# Altium PCB EG701_BMS.PcbDoc (part 2 of 2)
Units mm, origin at the board's own origin, x right, y up, seen from the top; angles counter-clockwise.
Board outline 90 x 50 mm, 2 copper layers (Top Layer, Bottom Layer); 94 components, 53 nets, 237 pads, 123 vias.
Unrouted connection lines stored in the file: 37.
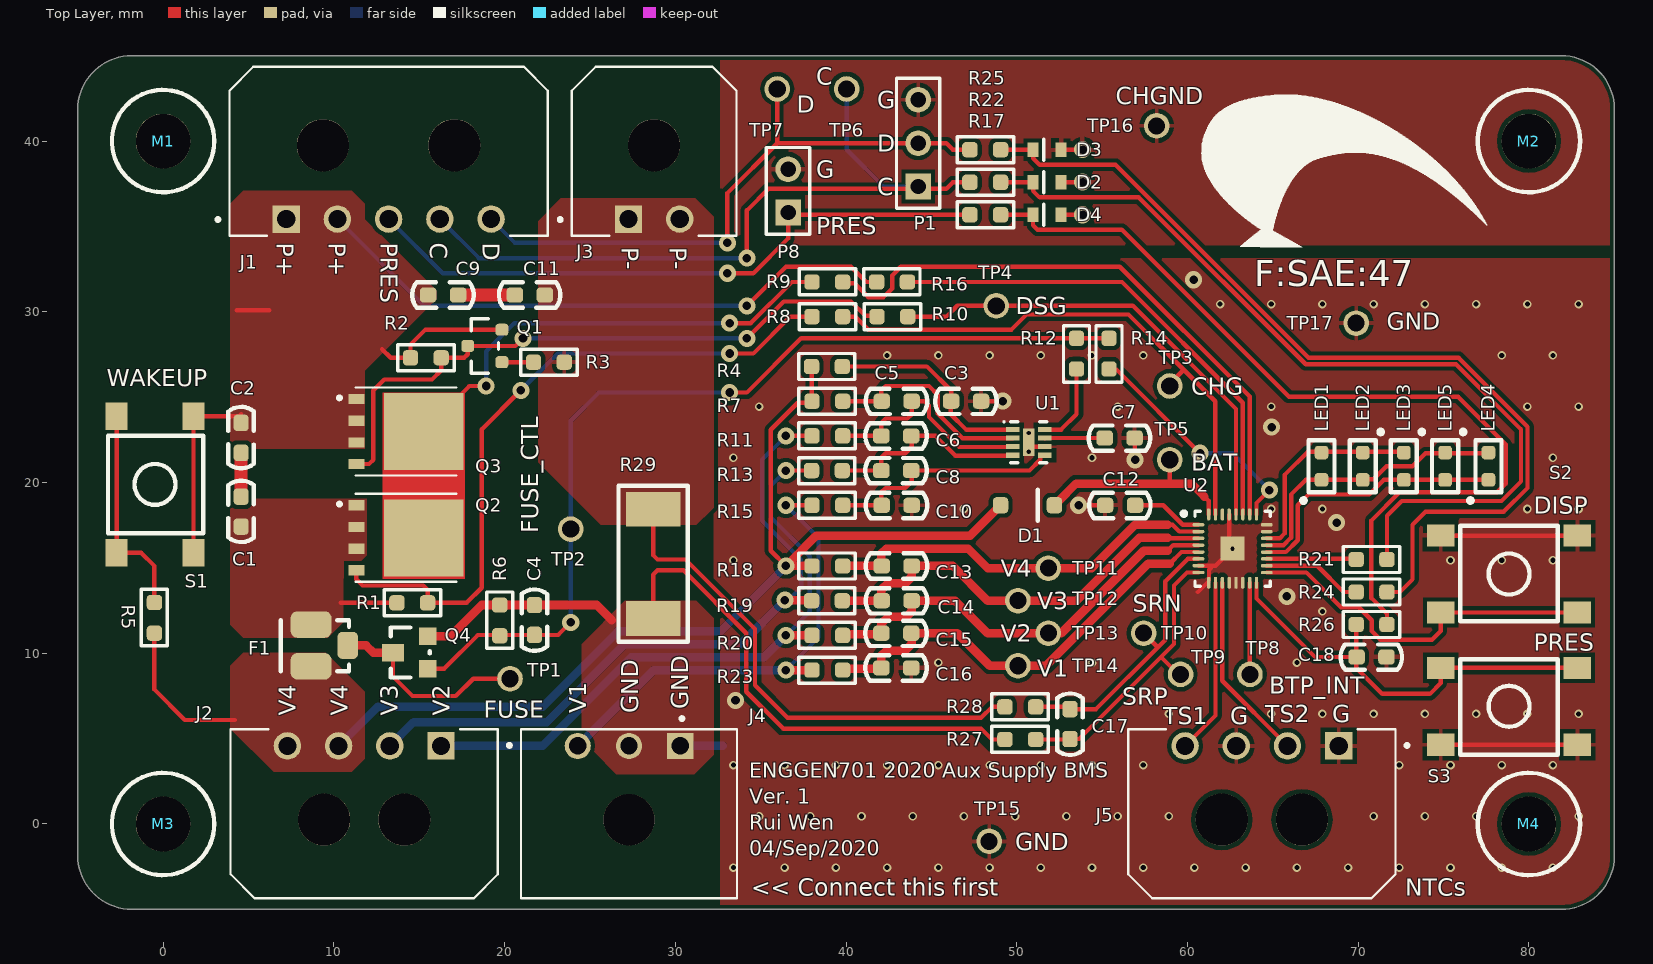
[diagram p0: Top Layer view]

## Part data (continued)
R4 R9 R18 R19 R20 R22 R23 R25 R27 R28: library part 100R_0603_5%_1/10W, "Res Thick Film 0603 100 Ohm 5% 0.1W(1/10W) ±100ppm/C Molded SMD Paper T/R", Case/Package=0603, Case Code (Metric)=1608, Manufacturer 1=Yageo, Manufacturer Part Number 1=RC0603JR-07100RL, Max Operating Temperature=155°C, Min Operating Temperature=-55°C, Power Rating=100mW, Supplier Part Number 1=311-100GRCT-ND, Temperature Coefficient=100ppm/°C, Tolerance=5%, Voltage Rating=50V, Case Code (Imperial)=0603, ComponentLink1Description=https://datasheet.ciiva.com/15189/getdatasheetpartid-325207-15189846.pdf?src-supplier=Verical, ComponentLink1URL=https://datasheet.ciiva.com/15189/getdatasheetpartid-325207-15189846.pdf?src-supplier=Verical, ComponentLink2Description=https://datasheet.ciiva.com/7746/443971-7746425.pdf?src-supplier=Element14, ComponentLink2URL=https://datasheet.ciiva.com/7746/443971-7746425.pdf?src-supplier=Element14, ComponentLink3Description=https://datasheet.ciiva.com/8883/pyu-rc0603-51-rohs-l-4-8883047.pdf?src-supplier=Avnet, ComponentLink3URL=https://datasheet.ciiva.com/8883/pyu-rc0603-51-rohs-l-4-8883047.pdf?src-supplier=Avnet, ComponentLink4Description=https://datasheet.ciiva.com/7746/443971-7746426.pdf?src-supplier=Element14, ComponentLink4URL=https://datasheet.ciiva.com/7746/443971-7746426.pdf?src-supplier=Element14, Composition="Thick Film", Contact Plating=Tin,Matte, Depth=0.8mm, Lead Free="Lead Free", Length=1.6mm, Military Standard=Not, Number of Pins=2, Packaging="Tape and Reel", Pricing 1="1=0.10000, 10=0.01800, 100=0.00740, 1000=0.00334, 2500=0.00290 (USD)", Radiation Hardening=No, REACH SVHC=Unknown, Resistance=100R, RoHS=Yes, Stock 1=6886393, Supplier 1=Digi-Key, Termination=SMD/SMT, Voltage Rating (DC)=50V, Width=0.8mm
R6: library part 51K_0603_1%_1/10W, "RES SMD 51K OHM 1% 1/10W 0603", Case/Package=0603, Case Code (Metric)=1608, Manufacturer 1=Yageo, Manufacturer Part Number 1=RC0603FR-0751KL, Max Operating Temperature=155°C, Max Power Dissipation=100mW, Min Operating Temperature=-55°C, Package Quantity=1, Resistance=51kR, Supplier Part Number 1=311-51.0KHRCT-ND, Temperature Coefficient=100ppm/°C, Tolerance=1%, Voltage Rating=50V, Case Code (Imperial)=0603, ComponentLink1Description=https://datasheet.ciiva.com/11819/0900766b80f96399-11819378.pdf?src-supplier=RSComponents, ComponentLink1URL=https://datasheet.ciiva.com/11819/0900766b80f96399-11819378.pdf?src-supplier=RSComponents, ComponentLink2Description=https://datasheet.ciiva.com/12558/rc0603-272842-12558554.pdf?src-supplier=Mouser, ComponentLink2URL=https://datasheet.ciiva.com/12558/rc0603-272842-12558554.pdf?src-supplier=Mouser, ComponentLink3Description=https://datasheet.ciiva.com/2454/pyu-r-int-thick-7-2454123.pdf?src-supplier=Digi-Key, ComponentLink3URL=https://datasheet.ciiva.com/2454/pyu-r-int-thick-7-2454123.pdf?src-supplier=Digi-Key, ComponentLink4Description=https://datasheet.ciiva.com/2454/pyu-r-int-thick-7-2454124.pdf?src-supplier=Digi-Key, ComponentLink4URL=https://datasheet.ciiva.com/2454/pyu-r-int-thick-7-2454124.pdf?src-supplier=Digi-Key, ComponentLink5Description=https://datasheet.ciiva.com/2454/pyu-r-int-thick-7-2454125.pdf?src-supplier=Digi-Key, ComponentLink5URL=https://datasheet.ciiva.com/2454/pyu-r-int-thick-7-2454125.pdf?src-supplier=Digi-Key, ComponentLink6Description=https://datasheet.ciiva.com/46395/443971-46395014.pdf?src-supplier=Element14, ComponentLink6URL=https://datasheet.ciiva.com/46395/443971-46395014.pdf?src-supplier=Element14, Composition="Thick Film", Depth=0.8mm, Features="Moisture Resistant", Height=0.45mm, Lead Free="Lead Free", Length=1.6mm, Number of Pins=2, Number of Terminations=2, Packaging="Tape and Reel", Power Rating=100mW, Pricing 1="1=0.10000, 10=0.02200, 100=0.00900, 1000=0.00405, 2500=0.00352 (USD)", REACH SVHC="No SVHC", RoHS=Yes, Stock 1=3246526, Supplier 1=Digi-Key, Termination=SMD/SMT, Voltage Rating (DC)=50V, Width=0.8mm
R7 R11 R13 R15 R17: library part 1K_0603_1%_1/10W, "RES SMD 1K OHM 1% 1/10W 0603", Case/Package=0603, Case Code (Metric)=1608, Manufacturer 1=Yageo, Manufacturer Part Number 1=RC0603FR-071KL, Max Operating Temperature=155°C, Min Operating Temperature=-55°C, Power Rating=100mW, Resistance=1kR, Supplier Part Number 1=311-1.00KHRDKR-ND, Temperature Coefficient=100ppm/°C, Tolerance=1%, Voltage Rating=50V, Case Code (Imperial)=0603, ComponentLink1Description=https://datasheet.ciiva.com/11808/0900766b80f96399-11808081.pdf?src-supplier=RSComponents, ComponentLink1URL=https://datasheet.ciiva.com/11808/0900766b80f96399-11808081.pdf?src-supplier=RSComponents, ComponentLink2Description=https://datasheet.ciiva.com/25906/pyu-rc0603-51-rohs-l-4-25906933.pdf?src-supplier=Avnet+Europe, ComponentLink2URL=https://datasheet.ciiva.com/25906/pyu-rc0603-51-rohs-l-4-25906933.pdf?src-supplier=Avnet+Europe, ComponentLink3Description=https://datasheet.ciiva.com/7660/1868787-7660790.pdf?src-supplier=Element14, ComponentLink3URL=https://datasheet.ciiva.com/7660/1868787-7660790.pdf?src-supplier=Element14, ComponentLink4Description=https://datasheet.ciiva.com/7746/1738695-7746279.pdf?src-supplier=Element14, ComponentLink4URL=https://datasheet.ciiva.com/7746/1738695-7746279.pdf?src-supplier=Element14, ComponentLink5Description=https://datasheet.ciiva.com/7746/1686128-7746280.pdf?src-supplier=Element14, ComponentLink5URL=https://datasheet.ciiva.com/7746/1686128-7746280.pdf?src-supplier=Element14, ComponentLink6Description=https://datasheet.ciiva.com/28386/pyu-rc0603-51-rohs-l-4-28386648.pdf?src-supplier=Avnet+Europe, ComponentLink6URL=https://datasheet.ciiva.com/28386/pyu-rc0603-51-rohs-l-4-28386648.pdf?src-supplier=Avnet+Europe, ComponentLink7Description=https://datasheet.ciiva.com/7746/1738695-7746281.pdf?src-supplier=Element14, ComponentLink7URL=https://datasheet.ciiva.com/7746/1738695-7746281.pdf?src-supplier=Element14, ComponentLink8Description=https://datasheet.ciiva.com/8896/pyu-rc0603-51-rohs-l-4-8896106.pdf?src-supplier=Avnet, ComponentLink8URL=https://datasheet.ciiva.com/8896/pyu-rc0603-51-rohs-l-4-8896106.pdf?src-supplier=Avnet, ComponentLink9Description=https://datasheet.ciiva.com/15189/getdatasheetpartid-404327-15189644.pdf?src-supplier=Verical, ComponentLink9URL=https://datasheet.ciiva.com/15189/getdatasheetpartid-404327-15189644.pdf?src-supplier=Verical, ComponentLink10Description=https://datasheet.ciiva.com/7983/443971-7983613.pdf?src-supplier=Element14, ComponentLink10URL=https://datasheet.ciiva.com/7983/443971-7983613.pdf?src-supplier=Element14, Composition="Thick Film", Contact Plating=Tin,Matte, Depth=0.8mm, Height=0.45mm, Lead Free="Lead Free", Length=1.6mm, Military Standard=Not, Packaging="Tape and Reel", Pricing 1="1=0.10000, 10=0.02300, 100=0.00940, 1000=0.00421, 2500=0.00366 (USD)", Radiation Hardening=No, REACH SVHC="No SVHC", RoHS=Yes, Stock 1=40608315, Supplier 1=Digi-Key, Termination=SMD/SMT
R8 R10 R12 R14: library part 5K1_0603_1%_1/10W, "RES SMD 5.1K OHM 1% 1/10W 0603", Case/Package=0603, Case Code (Metric)=1608, Manufacturer 1=Yageo, Manufacturer Part Number 1=RC0603FR-075K1L, Max Operating Temperature=155°C, Max Power Dissipation=100mW, Min Operating Temperature=-55°C, Package Quantity=1, Resistance=5.1kR, Supplier Part Number 1=311-5.10KHRCT-ND, Temperature Coefficient=100ppm/°C, Tolerance=1%, Voltage Rating=50V, Case Code (Imperial)=0603, ComponentLink1Description=https://datasheet.ciiva.com/46395/443971-46395016.pdf?src-supplier=Element14, ComponentLink1URL=https://datasheet.ciiva.com/46395/443971-46395016.pdf?src-supplier=Element14, ComponentLink2Description=https://datasheet.ciiva.com/15189/getdatasheetpartid-326732-15189786.pdf?src-supplier=Verical, ComponentLink2URL=https://datasheet.ciiva.com/15189/getdatasheetpartid-326732-15189786.pdf?src-supplier=Verical, ComponentLink3Description=https://datasheet.ciiva.com/2454/pyu-r-int-thick-7-2454045.pdf?src-supplier=Digi-Key, ComponentLink3URL=https://datasheet.ciiva.com/2454/pyu-r-int-thick-7-2454045.pdf?src-supplier=Digi-Key, ComponentLink4Description=https://datasheet.ciiva.com/2454/pyu-r-int-thick-7-2454046.pdf?src-supplier=Digi-Key, ComponentLink4URL=https://datasheet.ciiva.com/2454/pyu-r-int-thick-7-2454046.pdf?src-supplier=Digi-Key, ComponentLink5Description=https://datasheet.ciiva.com/2454/pyu-r-int-thick-7-2454047.pdf?src-supplier=Digi-Key, ComponentLink5URL=https://datasheet.ciiva.com/2454/pyu-r-int-thick-7-2454047.pdf?src-supplier=Digi-Key, Composition="Thick Film", Depth=0.8mm, Features="Moisture Resistant", Height=0.022inch, Lead Free="Lead Free", Length=0.063inch, Military Standard=Not, Number of Pins=2, Number of Terminations=2, Packaging="Tape and Reel", Power Rating=100mW, Pricing 1="1=0.10000, 10=0.02200, 100=0.00900, 1000=0.00405, 2500=0.00352 (USD)", REACH SVHC="No SVHC", RoHS=Yes, Stock 1=2194732, Supplier 1=Digi-Key, Termination=SMD/SMT, Voltage Rating (DC)=50V, Width=0.031inch
R21 R24 R26: library part 200R_0603_1%_1/10W, "RES SMD 200 OHM 1% 1/10W 0603", Case/Package=0603, Case Code (Metric)=1608, Manufacturer 1=Yageo, Manufacturer Part Number 1=RC0603FR-07200RL, Max Operating Temperature=155°C, Min Operating Temperature=-55°C, Package Quantity=5000, Power Rating=100mW, Supplier Part Number 1=311-200HRCT-ND, Temperature Coefficient=100ppm/°C, Tolerance=1%, Voltage Rating=50V, Working Voltage=75V, Case Code (Imperial)=0603, ComponentLink1Description=https://datasheet.ciiva.com/11809/0900766b80f96399-11809240.pdf?src-supplier=RSComponents, ComponentLink1URL=https://datasheet.ciiva.com/11809/0900766b80f96399-11809240.pdf?src-supplier=RSComponents, ComponentLink2Description=https://datasheet.ciiva.com/46395/443971-46395029.pdf?src-supplier=Element14, ComponentLink2URL=https://datasheet.ciiva.com/46395/443971-46395029.pdf?src-supplier=Element14, Composition="Thick Film", Depth=0.8mm, Height=0.45mm, Lead Free="Lead Free", Length=1.6mm, Military Standard=Not, Number of Pins=2, Number of Terminations=2, Packaging="Tape and Reel", Pricing 1="1=0.10000, 10=0.02200, 100=0.00900, 1000=0.00405, 2500=0.00352 (USD)", REACH SVHC="No SVHC", Resistance=200R, RoHS=Yes, Stock 1=2577421, Supplier 1=Digi-Key, Termination=SMD/SMT, Voltage Rating (DC)=50V, Width=0.8mm
R29: library part 0.001R_2512_1%_2W_50ppm, "RES 0.001 OHM 1% 2W 2512", Case/Package=2512, Case Code (Metric)=6432, Manufacturer 1="Stackpole Electronics", Manufacturer Part Number 1=CSNL2512FT1L00, Max Operating Temperature=170°C, Max Power Dissipation=2W, Min Operating Temperature=-55°C, Resistance=1mR, Supplier Part Number 1=CSNL2512FT1L00CT-ND, Temperature Coefficient=50ppm/°C, Tolerance=1%, Case Code (Imperial)=2512, ComponentLink1Description=http://components.arrow.com/part/dataview/47858191S8378277N1174?src-supplier=Arrow, ComponentLink1URL=http://components.arrow.com/part/dataview/47858191S8378277N1174?src-supplier=Arrow, ComponentLink2Description=http://www.seielect.com/Catalog/SEI-csnl.pdf?src-supplier=Future+Electronics, ComponentLink2URL=http://www.seielect.com/Catalog/SEI-csnl.pdf?src-supplier=Future+Electronics, ComponentLink3Description=https://www.seielect.com/catalog/SEI-Packaging.pdf?src-supplier=Digi-Key, ComponentLink3URL=https://www.seielect.com/catalog/SEI-Packaging.pdf?src-supplier=Digi-Key, ComponentLink4Description=https://www.seielect.com/Catalog/SEI-csnl.pdf?src-supplier=Digi-Key, ComponentLink4URL=https://www.seielect.com/Catalog/SEI-csnl.pdf?src-supplier=Digi-Key, ComponentLink5Description=https://www.seielect.com/Catalog/SEI-CSNL.pdf?src-supplier=Avnet, ComponentLink5URL=https://www.seielect.com/Catalog/SEI-CSNL.pdf?src-supplier=Avnet, Composition="Metal Foil", Contact Plating=Tin,Matte, Features="Moisture Resistant", Height=0.033inch, Lead Free="Lead Free", Length=0.25inch, Mount="Surface Mount", Number of Terminations=2, Packaging="Tape and Reel", Power Rating=2W, Pricing 1="1=0.65000, 10=0.53900, 25=0.46200, 50=0.41580, 100=0.36190, 250=0.32340, 500=0.26180, 1000=0.21175 (USD)", Radiation Hardening=No, RoHS=Yes, Stock 1=126804, Supplier 1=Digi-Key, Width=0.125inch
S1 S2 S3: library part 41-KRSM6-1, "SMT tact switch from Hi-Q"
TP1 TP2 TP3 TP4 TP5 TP6 TP7 TP8 TP9 TP10 TP11 TP12 TP13 TP14 TP15 TP16 TP17: library part TP_5021, "Thru Hole Mount Unisulated Test Point", Color=Silver, Manufacturer 1="Keystone Electronics", Manufacturer Part Number 1=5021, Package Quantity=100, Supplier Part Number 1=36-5021-ND, Body Material=Bronze, ComponentLink1Description=https://datasheet.ciiva.com/15242/5021-15242766.pdf?src-supplier=Arrow+Europe, ComponentLink1URL=https://datasheet.ciiva.com/15242/5021-15242766.pdf?src-supplier=Arrow+Europe, ComponentLink2Description=https://datasheet.ciiva.com/2917/5021-2917622.pdf?src-supplier=Digi-Key, ComponentLink2URL=https://datasheet.ciiva.com/2917/5021-2917622.pdf?src-supplier=Digi-Key, Contact Material=Bronze, Contact Plating=Silver, Lead Free="Lead Free", Material=Bronze,Silver, Mount="Through Hole", Packaging=Bulk, Plating=Silver, Pricing 1="1=0.23000, 25=0.18760, 100=0.17820, 250=0.16780, 500=0.15050, 1000=0.10548, 2500=0.09669, 5000=0.09376, 10000=0.08497 (USD)", REACH SVHC="No SVHC", RoHS=Yes, Stock 1=36492, Supplier 1=Digi-Key
U1: "IC BATT PROT 2-4CELL LIION 8WSON", Manufacturer 1="Texas Instruments", Max Operating Temperature=85°C, Min Operating Temperature=-40°C, Operating Supply Current=1uA, Operating Supply Voltage=20V, Output Current=4.5mA, Output Voltage=30V, Package Quantity=1, Supplier Part Number 1=296-34984-1-ND, ComponentLink1Description=https://datasheet.ciiva.com/6613/bq294700-6613741.pdf?src-supplier=Digi-Key, ComponentLink1URL=https://datasheet.ciiva.com/6613/bq294700-6613741.pdf?src-supplier=Digi-Key, ComponentLink2Description=https://datasheet.ciiva.com/6613/bq294700-6613742.pdf?src-supplier=Digi-Key, ComponentLink2URL=https://datasheet.ciiva.com/6613/bq294700-6613742.pdf?src-supplier=Digi-Key, ComponentLink3Description=https://datasheet.ciiva.com/6613/bq294700-6613743.pdf?src-supplier=Digi-Key, ComponentLink3URL=https://datasheet.ciiva.com/6613/bq294700-6613743.pdf?src-supplier=Digi-Key, Contact Plating=Gold, Lead Free="Lead Free", Manufacturer Part Number 1=BQ294700DSGR, Mount="Surface Mount", Number of Pins=8, Packaging="Tape and Reel", Pricing 1="1=0.86000, 10=0.75900, 25=0.71320, 100=0.54050, 250=0.46000, 500=0.43700, 1000=0.33350 (USD)", RoHS=Yes, Stock 1=15401, Supplier 1=Digi-Key
U2: "1-4 series Li-ion battery pack manager supporting Turbo Mode 2.0 32-VQFN -40 to 85", Case/Package=VQFN, Manufacturer 1="Texas Instruments", Max Operating Temperature=85°C, Min Operating Temperature=-40°C, Supplier Part Number 1=296-49567-1-ND, ComponentLink1Description=http://www.ti.com/lit/ds/symlink/bq40z50-r2.pdf?src-supplier=Digi-Key, ComponentLink1URL=http://www.ti.com/lit/ds/symlink/bq40z50-r2.pdf?src-supplier=Digi-Key, Fault Protection="Over Current,Over Temperature,Short Circuit,Over/Under Voltage", Interface=SMBus, Manufacturer Part Number 1=BQ40Z50RSMR-R2, Packaging="Cut Tape", Pricing 1="1=5.59000, 10=5.02200, 25=4.74760, 100=3.90350, 250=3.50260, 500=3.37600, 1000=2.80630 (USD)", RoHS=No, Stock 1=2467, Supplier 1=Digi-Key

## Via types
v1: diameter 0.5, hole 0.3, Top Layer to Bottom Layer, tented both sides, 88 vias
v2: diameter 1, hole 0.5, Top Layer to Bottom Layer, tented both sides, 32 vias
v3: diameter 0.5, hole 0.25, Top Layer to Bottom Layer, tented bottom, 3 vias

## Nets (pads, with @x,y where several pads share a name; then routed paths per layer and width w, separated by ;. In a path a pad name is that pad's centre, name@x,y a point inside that pad or via, vN(x,y) a via of type N, cw(c..) or ccw(c..) an arc to the next point about the centre after c; other vN are vias at no path point)
BAT: D1.2 TP5.1 U2.32 | length 12.2
  Top Layer w0.254: 58.961,19.939 TP5.1 ; 60.993,19.177 61.244,18.926 U2.32
  Top Layer w0.5: D1.2 52.205,18.694 52.405,18.894 52.43,18.894 53.475,19.939 58.961,19.939 60.231,19.939 60.993,19.177
BAT_V1: J4.3 R15.1 R23.1 | length 28.3
  Top Layer w0.254: v2(36.482,18.669) R15.1
  Top Layer w0.5: v2(36.482,9.017) R23.1
  Bottom Layer w0.254: v2(36.482,9.017) 38.387,10.922 38.387,16.764 v2(36.482,18.669)
  Bottom Layer w0.5: J4.3 28.735,9.017 v2(36.482,9.017)
BAT_V2: J2.1 R13.1 R20.1 | length 37.5
  Top Layer w0.254: v2(36.482,20.701) R13.1
  Top Layer w0.5: v2(36.482,11.049) R20.1 R20.1@37.985,11.07
  Bottom Layer w0.254: v2(36.482,11.049) 37.879,12.446 37.879,15.47 37.871,15.478 37.871,15.688 35.601,17.958 35.601,19.82 v2(36.482,20.701)
  Bottom Layer w0.5: J2.1 22.227,4.574 27.432,9.779 35.196,9.779 35.204,9.771 v2(36.482,11.049)
BAT_V3: J2.2 R11.1 R19.1 | length 41.4
  Top Layer w0.254: v2(36.482,22.733) R11.1
  Top Layer w0.5: v2(36.418,13.113) 36.434,13.097 37.968,13.097 R19.1
  Bottom Layer w0.254: v2(36.418,13.113) 36.62,13.113 37.122,13.615 37.143,13.615 37.371,13.843 37.371,14.351 37.363,14.359 37.363,15.478 35.085,17.756 35.085,21.336 v2(36.482,22.733)
  Bottom Layer w0.5: J2.2 14.676,5.969 22.479,5.969 27.035,10.525 33.831,10.525 v2(36.418,13.113)
BAT_V4: D1.1 F1.3 J2.3 J2.4 R4.1 R5.2 R7.1 R18.1 | length 68.4
  Top Layer w0.254: R5.2 -0.508,7.874 1.27,6.096 4.191,6.096 ; v2(36.482,15.113) 35.593,16.002 35.593,23.09 37.175,24.672 37.913,24.672 R7.1 37.995,24.776 R4.1@37.995,26.786
  Top Layer w0.5: R18.1 v2(36.482,15.113) 38.26,16.891 47.277,16.891 48.83,18.444 48.855,18.444 49.055,18.644 D1.1
  Bottom Layer w0.5: J2.3 12.565,6.858 22.225,6.858 26.646,11.279 32.648,11.279 v2(36.482,15.113)
BTP_INT: TP8.1 U2.15 | length 5.4
  Top Layer w0.254: U2.15 63.644,8.779 TP8.1
CHG: R8.1 TP3.1 U2.31 | length 32.5
  Top Layer w0.254: R8.1 40.546,29.718 41.308,28.956 49.69,28.956 50.579,29.845 56.548,29.845 59.786,26.607 ; TP3.1 58.961,25.781 59.786,26.607 ; U2.31 61.628,18.145 61.628,24.765 59.786,26.607
CHGND: C11.1 D2.1 D3.1 D4.1 J3.1 J3.2 P1.3 P8.2 R3.1 R28.1 R29.2 TP16.1 | length 33.3
  Top Layer w0.254: R29.2 28.702,15.748 28.956,15.494 30.607,15.494 34.671,11.43 34.671,8.128 36.576,6.223 47.912,6.223 48.547,6.858 R28.1 ; D4.1 v2(53.859,35.687) ; D2.1 v2(53.859,37.592) ; D3.1 v2(53.859,39.497)
DSG: R10.1 TP4.1 U2.28 | length 28.2
  Top Layer w0.254: R10.1 45.88,29.718 46.515,30.353 TP4.1 56.802,30.353 62.844,24.311 U2.28
FUSE: C4.2 Q4.1 R6.2 R12.2 R14.2 TP2.1 | length 54.8
  Top Layer w0.254: Q4.1 16.459,9.093 18.44,11.074 C4.2 23.139,11.074 v2(23.876,11.811) ; v2(33.18,25.273) 34.196,25.273 37.371,28.448 R12.2 R14.2
  Bottom Layer w0.254: v2(23.876,11.811) TP2.1 23.876,23.622 25.527,25.273 v2(33.18,25.273)
GND: C3.1 C4.1 C7.1 C10.1 C12.2 C16.1 C18.1 J4.1 J4.2 J5.1 J5.3 Q4.2 R6.1 R27.1 R29.1 S2.2 S3.2 TP15.1 TP17.1 U1.6 U1.9 U2.7 U2.9 U2.12 U2.13 U2.14 U2.23 U2.24 U2.29 U2.33 | length 71.2
  Top Layer w0.254: R29.1 28.702,14.605 28.956,14.859 30.48,14.859 34.163,11.176 34.163,7.747 36.322,5.588 47.912,5.588 48.547,4.953 R27.1 ; C3.1 v2(49.182,24.765) ; U1.9 50.706,22.32 50.924,22.102 U1.6 ; v2(53.627,18.669) C12.2 ; C7.1 56.929,22.581 v2(56.929,21.336) ; 60.612,13.589 61.263,14.24 61.263,14.875 61.374,14.986 ; U2.7 61.644,15.129 v3(62.644,16.129) 62.444,16.329 U2.29 ; S2.2@74.836,16.891 S2.2@82.836,16.891 ; S3.2@74.837,4.644 S3.2@82.837,4.644
  Top Layer w0.5: Q4.2 16.84,10.998 18.669,12.827 25.4,12.827 26.289,11.938
  Bottom Layer w0.5: J4.1 32.766,4.572
  other v1: 33.408,-2.549 36.408,-2.549 39.408,-2.549 42.408,-2.549 45.408,-2.549 48.408,-2.549 51.408,-2.549 54.408,-2.549 57.408,-2.549 60.408,-2.549 63.408,-2.549 66.408,-2.549 69.408,-2.549 72.408,-2.549 75.408,-2.549 78.408,-2.549 81.408,-2.549 34.908,0.451 37.908,0.451 40.908,0.451 43.908,0.451 46.908,0.451 49.908,0.451 52.908,0.451 55.908,0.451 58.908,0.451 70.908,0.451 73.908,0.451 76.908,0.451 82.908,0.451 33.408,3.451 36.408,3.451 39.408,3.451 42.408,3.451 45.408,3.451 48.408,3.451 51.408,3.451 54.408,3.451 57.408,3.451 72.408,3.451 75.408,3.451 78.408,3.451 81.408,3.451 58.908,6.451 64.908,6.451 67.908,6.451 70.908,6.451 73.908,6.451 76.908,6.451 79.908,6.451 82.908,6.451 45.408,9.451 54.408,9.451 66.408,9.451 67.908,12.451 33.408,15.451 75.408,15.451 78.408,15.451 81.408,15.451 46.908,18.451 64.908,18.451 67.908,18.451 79.908,18.451 82.908,18.451 33.408,21.451 54.408,21.451 81.408,21.451 34.908,24.451 55.908,24.451 64.908,24.451 79.908,24.451 82.908,24.451 42.408,27.451 45.408,27.451 48.408,27.451 51.408,27.451 54.408,27.451 57.408,27.451 78.408,27.451 81.408,27.451 61.908,30.451 64.908,30.451 67.908,30.451 70.908,30.451 73.908,30.451 76.908,30.451 79.908,30.451 82.908,30.451
  other v2: 33.528,7.239 65.819,13.335 68.74,17.653 64.93,23.241 60.358,31.877
  other v3: 50.706,21.802 50.706,22.902
NetC1_1: C1.1 F1.1 Q2.1 R1.2 | length 3.3
  Top Layer w0.254: 10.414,12.954 R1.2
NetC1_2: C1.2 C2.1
NetC3_2: C3.2 R4.2 U1.1 | length 12.3
  Top Layer w0.254: R4.2 44.737,26.797 46.159,25.375 C3.2 46.134,24.74 46.134,24.003 47.035,23.102 U1.1
NetC5_1: C5.1 C6.2 R11.2 U1.3 | length 13.2
  Top Layer w0.254: R11.2 C6.2 42.07,23.495 42.324,23.749 43.594,23.749 43.848,24.003 C5.1 44.61,24.765 44.864,24.511 44.864,23.836 46.614,22.086 U1.3@49.761,22.086
NetC5_2: C5.2 R7.2 U1.2 | length 12.6
  Top Layer w0.254: R7.2 C5.2 42.07,24.79 42.07,25.4 42.324,25.654 44.864,25.654 45.372,25.146 45.372,24.047 46.825,22.594 U1.2@49.761,22.594
NetC6_1: C6.1 C8.2 R13.2 U1.4 | length 12.2
  Top Layer w0.254: R13.2 C8.2 42.07,21.463 42.324,21.717 43.467,21.717 43.848,22.098 43.848,22.708 C6.1 45.249,22.733 46.404,21.578 U1.4@49.761,21.578
NetC7_2: C7.2 U1.7 | length 3.5
  Top Layer w0.254: U1.7 51.655,22.606 C7.2
NetC8_1: C8.1 C10.2 R15.2 U1.5 | length 14
  Top Layer w0.254: R15.2 C10.2 ; C10.2@42.07,18.796 42.07,19.431 42.324,19.685 43.467,19.685 43.848,20.066 43.848,20.676 C8.1 50.75,20.701 51.378,21.329 51.378,21.579 51.401,21.602 U1.5 U1.5@51.658,21.595
NetC9_1: C9.1 C11.2
NetC12_1: C12.1 U2.1 | length 4.2
  Top Layer w0.254: C12.1 58.58,18.669 59.723,17.526 60.641,17.526 U2.1
NetC18_2: C18.2 R26.1 S3.1 U2.16 | length 25.5
  Top Layer w0.254: U2.16 64.041,14.126 64.041,13.208 67.47,9.779 C18.2@69.883,9.779 ; R26.1 C18.2@69.883,9.779 ; C18.2 C18.2@69.883,9.779 ; S3.1@82.837,9.144 74.837,9.144 74.837,8.256 74.201,7.62 71.407,7.62 69.883,9.144 C18.2@69.883,9.779
NetD2_2: D2.2 R21.2 R22.1 | length 51.1
  Top Layer w0.254: R22.1 D2.2 50.96,37.581 50.96,37.084 51.341,36.703 57.152,36.703 66.931,26.924 75.725,26.924 79.535,23.114 79.535,20.066 78.392,18.923 72.55,18.923 71.683,18.056 R21.2
NetD3_2: D3.2 R24.2 R25.1 | length 54.1
  Top Layer w0.254: R25.1 D3.2 50.96,39.486 50.96,38.989 51.341,38.608 55.786,38.608 67.089,27.305 75.883,27.305 79.916,23.272 79.916,19.685 78.519,18.288 73.947,18.288 73.185,17.526 73.185,14.329 72.445,13.589 R24.2
NetD4_2: D4.2 R17.1 R26.2 | length 53.1
  Top Layer w0.254: R17.1 D4.2 D4.2 50.95,35.074 51.218,34.806 56.159,34.806 65.946,25.019 75.852,25.019 78.646,22.225 78.646,19.939 78.138,19.431 72.423,19.431 70.772,17.78 70.772,13.23 71.683,12.319 R26.2
NetF1_2: F1.2 Q4.3 TP1.1 | length 12
  Top Layer w0.254: Q4.3 13.462,8.636 14.605,7.493 17.145,7.493 18.161,8.509 TP1.1
  Top Layer w0.5: F1.2 11.893,10.459 12.319,10.033 Q4.3
NetLED1_1: LED1.1 LED2.2 LED3.2 U2.22 | length 12.2
  Top Layer w0.254: U2.22 65.403,16.729 65.692,17.018 65.692,20.447 67.054,21.809 72.623,21.809 LED3.2
NetLED1_2: LED1.2 LED2.1 LED4.1 LED5.2 U2.21 | length 16.7
  Top Layer w0.254: U2.21 65.626,16.329 66.073,16.776 66.073,19.304 66.924,20.155 LED1.2 LED2.1 70.299,20.19 70.896,20.19 71.661,20.955 73.185,20.955 73.947,21.717 77.592,21.717 LED4.1
NetLED3_1: LED3.1 LED4.2 LED5.1 U2.20 | length 15.9
  Top Layer w0.254: U2.20 65.765,15.929 66.454,16.618 66.454,18.669 67.089,19.304 70.645,19.304 71.496,20.155 LED3.1 LED5.1 LED4.2
NetQ1_2: Q1.2 R3.2 | length 1.8
  Top Layer w0.254: Q1.2 R3.2
NetQ1_3: Q1.3 Q3.4 R2.1 R10.2 | length 38.3
  Top Layer w0.254: Q3.4 12.065,21.082 12.319,21.336 12.319,25.4 12.954,26.035 15.748,26.035 16.289,26.576 R2.1 17.631,27.305 17.845,27.519 Q1.3 20.635,28.001 20.889,28.255 21.082,28.062 v2(21.082,28.448) ; v2(34.196,28.448) 36.355,30.607 40.292,30.607 41.134,29.765 41.769,29.765 R10.2
  Bottom Layer w0.254: v2(21.082,28.448) v2(34.196,28.448)
NetQ2_4: Q2.4 R1.1 R8.2 | length 40.6
  Top Layer w0.254: Q2.4 11.323,14.331 11.684,13.97 15.24,13.97 15.494,13.716 R1.1 17.78,12.954 18.669,13.843 18.669,23.114 v2(20.955,25.4) ; v2(33.18,27.559) 34.577,27.559 36.736,29.718 R8.2
  Bottom Layer w0.254: v2(20.955,25.4) 23.114,27.559 v2(33.18,27.559)
NetQ2_5: Q2.5 Q3.5 R9.2 | length 27.6
  Top Layer w0.254: Q3.5 17.94,25.654 v2(18.923,25.654) ; v2(33.18,29.337) 34.426,29.337 36.839,31.75 R9.2
  Bottom Layer w0.254: v2(18.923,25.654) 18.923,27.686 20.574,29.337 v2(33.18,29.337)
NetR5_1: R5.1 S1.1 | length 12.7
  Top Layer w0.254: S1.1@-2.722,23.892 -2.722,15.892 -1.287,15.892 -0.508,15.113 R5.1
NetR12_1: R12.1 U1.8 | length 4.9
  Top Layer w0.254: U1.8 52.599,23.102 53.5,24.003 R12.1
NetR14_1: R14.1 U2.25 | length 14.1
  Top Layer w0.254: R14.1 55.808,26.648 v2(60.739,21.717) ; U2.25 64.044,18.799 v2(64.803,19.558)
  Bottom Layer w0.254: v2(60.739,21.717) 62.644,21.717 v2(64.803,19.558)
NetR16_2: R16.2 U2.27 | length 29.1
  Top Layer w0.254: R16.2 56.167,31.75 63.244,24.673 U2.27
NetS2_1: S2.1 U2.17 | length 21.5
  Top Layer w0.254: U2.17 66.965,14.729 68.994,12.7 70.032,12.7 70.794,11.938 70.794,11.303 71.302,10.795 74.328,10.795 74.836,11.303 74.836,12.391 S2.1@82.836,12.391
P\R\E\S\: J1.3 P8.1 R17.2 | length 37.7
  Top Layer w0.254: v2(33.053,32.258) 34.577,32.258 36.609,34.29 P8.1@36.609,35.687 ; P8.1 P8.1@36.609,35.687 ; R17.2 P8.1@36.609,35.687
  Bottom Layer w0.254: J1.3 16.385,32.258 v2(33.053,32.258)
PACK+: C2.2 C9.2 J1.1 J1.2 Q1.1 Q3.1 R2.2 R16.1 S1.2 | length 56.1
  Top Layer w0.254: S1.2@1.778,15.892 1.778,23.892 4.461,23.892 4.572,24.003 ; 4.317,30.098 4.318,30.099 6.223,30.099 ; 12.827,27.813 13.335,27.305 R2.2 14.489,28.078 15.367,28.956 19.84,28.956 Q1.1 ; v2(34.196,30.353) 36.482,32.639 40.292,32.639 41.181,31.75 R16.1
  Bottom Layer w0.254: J1.2 15.29,30.353 v2(34.196,30.353)
SMBC: J1.4 P1.1 R22.2 TP6.1 | length 44.1
  Top Layer w0.254: v2(34.196,33.147) 34.196,35.941 35.466,37.211 45.88,37.211 46.261,37.592 R22.2
  Bottom Layer w0.254: J1.4 18.496,33.147 v2(34.196,33.147) ; TP6.1 40.038,39.497 42.197,37.338 P1.1
SMBC_BQ: R21.1 U2.19 | length 5.2
  Top Layer w0.254: U2.19 R21.1@69.883,15.529
SMBD: J1.5 P1.2 R25.2 TP7.1 | length 36.1
  Top Layer w0.254: v2(33.053,34.036) 33.053,36.957 35.974,39.878 ; TP7.1 35.974,39.878 ; R25.2 46.261,39.497 45.88,39.878 P1.2 35.974,39.878
  Bottom Layer w0.254: J1.5 20.607,34.036 v2(33.053,34.036)
SMBD_BQ: R24.1 U2.18 | length 5.9
  Top Layer w0.254: U2.18 67.603,15.129 69.143,13.589 R24.1
SRN: C17.1 R28.2 TP10.1 U2.6 | length 16.4
  Top Layer w0.254: R28.2 52.992,6.858 C17.1 54.643,6.731 58.326,10.414 ; TP10.1 58.199,10.414 58.326,10.414 ; U2.6 60.012,15.529 58.707,14.224 58.707,10.795 58.326,10.414
SRP: C17.2 R27.2 TP9.1 U2.8 | length 17.2
  Top Layer w0.254: R27.2 53.094,4.953 C17.2 53.652,4.978 58.453,9.779 ; TP9.1 59.469,8.763 58.453,9.779 ; U2.8 60.641,14.732 59.977,14.732 59.215,13.97 59.215,10.541 58.453,9.779
TS1: J5.4 U2.10 | length 10.3
  Top Layer w0.254: J5.4 61.644,6.359 U2.10
TS2: J5.2 U2.11 | length 11.1
  Top Layer w0.254: U2.11 62.044,8.389 J5.2
VC1: C15.1 C16.2 R23.2 TP14.1 U2.5 | length 26.1
  Top Layer w0.254: 58.961,15.24 59.65,15.929 U2.5
  Top Layer w0.5: R23.2 39.87,9.08 42.006,9.08 C16.2 42.07,9.867 42.363,10.16 43.467,10.16 43.848,10.541 43.848,11.151 C15.1 46.515,11.176 48.42,9.271 TP14.1 51.722,9.271 57.691,15.24 58.961,15.24
VC2: C14.1 C15.2 R20.2 TP13.1 U2.4 | length 25.3
  Top Layer w0.254: 58.834,16.002 59.161,16.329 U2.4
  Top Layer w0.5: R20.2 39.87,11.112 42.006,11.112 C15.2 42.07,11.752 42.451,12.133 43.535,12.133 43.848,12.446 C14.1 46.388,13.081 48.293,11.176 TP13.1 52.611,11.176 57.437,16.002 58.834,16.002
VC3: C13.1 C14.2 R19.2 TP12.1 U2.3 | length 24.9
  Top Layer w0.254: 58.834,16.764 58.869,16.729 U2.3
  Top Layer w0.5: R19.2 C14.2 42.07,13.106 42.07,13.716 42.451,14.097 43.467,14.097 43.848,14.478 C13.1 46.261,15.113 48.293,13.081 TP12.1 53.5,13.081 57.183,16.764 58.834,16.764
VC4: C13.2 R18.2 TP11.1 U2.2 | length 23.4
  Top Layer w0.254: 58.834,17.526 59.12,17.526 59.517,17.129 U2.2
  Top Layer w0.5: R18.2 C13.2 42.07,15.138 42.07,15.836 42.363,16.129 47.15,16.129 48.293,14.986 TP11.1 54.389,14.986 56.929,17.526 58.834,17.526
VCC: R9.1 U2.26 | length 35.4
  Top Layer w0.254: R9.1 39.875,31.681 40.488,31.681 41.308,30.861 42.197,30.861 42.705,31.369 42.705,32.131 43.213,32.639 56.04,32.639 63.644,25.035 U2.26
pads on no net: J1. J2. J3. J4. J5. M1.0 M2.0 M3.0 M4.0 U2.30

## Polygon pours and split planes (outlines as drawn)
GND on Top Layer "GND_L01_P054" (solid, remove dead copper, pour order 54): 32.639,4.699 32.639,12.192 33.782,11.049 33.782,7.493 36.576,4.699
no net on Top Layer "NONET_L01_P052" (solid, remove dead copper, pour order 52): 4.064,24.003
PACK+ on Top Layer "PACK+_L01_P050" (solid, remove dead copper, pour order 50): 11.811,21.971 3.937,21.971 3.937,36.322 4.699,37.084 11.049,37.084 11.811,36.322
NetC1_1 on Top Layer "NETC1_1_L01_P048" (solid, remove dead copper, pour order 48): 9.652,10.922 10.541,11.811 10.541,14.351 11.303,15.113 11.938,15.748 11.938,19.05 3.937,19.05 3.937,11.684 4.699,10.922
BAT_V4 on Top Layer "BAT_V4_L01_P046" (solid, remove dead copper, pour order 46): 6.477,3.048 11.049,3.048 11.811,3.81 11.811,7.747 9.525,10.033 4.699,10.033 3.937,9.271 3.937,5.588
GND on Top Layer "GND_L01_P044" (solid, remove dead copper, pour order 44): 31.242,13.081 32.258,12.065 32.258,4.064 31.115,2.921 26.543,2.921 24.511,4.953 24.511,10.541 27.051,13.081
CHGND on Top Layer "CHGND_L01_P022" (solid, remove dead copper, pour order 22): 23.304,36.639 31.178,36.639 32.258,35.56 32.258,18.542 31.242,17.526 25.644,17.526 21.971,21.199 21.971,30.353 21.971,35.306
PACK+ on Top Layer "PACK+_L01_P020" (solid, remove dead copper, pour order 20): 16.002,31.242 16.002,30.734 15.875,30.607 11.557,26.289 11.557,35.687 15.875,31.369
GND on Top Layer "GND_L01_P030" (solid, remove dead copper, pour order 30): 32.258,33.147 85,33.147 85,-5 51.087,-5 51.087,6.096 36.703,6.096 34.671,8.128 34.671,11.416 32.258,13.829
CHGND on Top Layer "CHGND_L01_P040" (solid, remove dead copper, pour order 40): 85,44.958 85,33.909 32.639,33.909 32.639,44.958
GND on Top Layer "GND_L01_P032" (solid, remove dead copper, pour order 32): 32.639,5.207 47.404,5.207 48.371,4.24 51.087,4.24 51.087,-5 51.04,-4.953 32.639,-4.953
CHGND on Bottom Layer "CHGND_L02_P038" (solid, remove dead copper, pour order 38): 85,44.958 85,33.909 24.671,33.909 24.671,44.958
GND on Bottom Layer "GND_L02_P034" (solid, remove dead copper, pour order 34): 84.996,33.147 84.996,-5.08 84.869,-4.953 32.258,-4.953 32.258,33.147

## Other copper
Top Layer:
  rectangle net NetC1_2: 4.191,19.558 4.953,21.59
  rectangle net NetC9_1: 17.526,30.607 20.32,31.369
  rectangle net NetQ2_5: 12.86,14.351 17.686,25.273

## Silkscreen, mask and mechanical layers (free items; w line width, h text height)
Top Overlay:
  region: 2465 vertices and 0 holes, not listed, extent 60.806,33.776 77.545,42.722
  text "C" at 38.26,43.307 h1
  text "CHGND" at 55.786,42.164 h1
  text "G" at 41.816,41.91 h1
  text "D" at 37.117,41.656 h1
  text "D" at 41.816,39.37 h1
  text "G" at 38.26,37.846 h1
  text "C" at 41.816,36.83 h1
  text "PRES" at 38.26,34.544 h1
  text "P+" at 6.646,34.038 h1 r270
  text "P+" at 9.694,34.038 h1 r270
  text "PRES" at 12.742,34.038 h1 r270
  text "C" at 15.663,34.038 h1 r270
  text "D" at 18.711,34.038 h1 r270
  text "P-" at 26.878,33.782 h1 r270
  text "P-" at 29.672,33.782 h1 r270
  text "F:SAE:47" at 63.914,31.496 h1.52
  text "DSG" at 49.944,29.845 h1
  text "GND" at 71.661,28.956 h1
  text "WAKEUP" at -3.302,25.654 h1
  text "CHG" at 60.231,25.146 h1
  text "BAT" at 60.231,20.701 h1
  text "DISP" at 80.297,18.161 h1
  text "FUSE_CTL" at 21.971,17.018 h1 r90
  text "V4" at 49.055,14.478 h1
  text "V3" at 51.214,12.573 h1
  text "SRN" at 56.802,12.446 h1
  text "V2" at 49.055,10.668 h1
  text "PRES" at 80.297,10.16 h1
  text "V1" at 51.214,8.636 h1
  text "BTP_INT" at 64.803,7.62 h1
  text "SRP" at 56.167,6.985 h1
  text "GND" at 30.767,6.731 h1 r90
  text "V1" at 24.798,6.477 h1 r90
  text "GND" at 27.846,6.477 h1 r90
  text "V4" at 7.772,6.352 h1 r90
  text "V4" at 10.82,6.352 h1 r90
  text "V3" at 13.741,6.352 h1 r90
  text "V2" at 16.789,6.352 h1 r90
  text "FUSE" at 18.796,6.223 h1
  text "TS2" at 64.549,5.969 h1
  text "G" at 68.486,5.969 h1
  text "TS1" at 58.58,5.842 h1
  text "G" at 62.517,5.842 h1
  text "ENGGEN701 2020 Aux Supply BMS" at 34.323,2.413 h1.5
  text "Ver. 1" at 34.323,0.889 h1.5
  text "Rui Wen" at 34.323,-0.635 h1.5
  text "GND" at 49.911,-1.524 h1
  text "04/Sep/2020" at 34.323,-2.159 h1.5
  text "<< Connect this first" at 34.45,-4.191 h1
  text "NTCs" at 72.771,-4.191 h1
Bottom Overlay:
  text "P+" at 7.789,34.038 h1 r90
  text "P+" at 10.71,34.038 h1 r90
  text "PRES" at 13.758,34.038 h1 r90
  text "SMBD" at 16.679,34.038 h1 r90
  text "SMBC" at 19.727,34.038 h1 r90
  text "P-" at 27.894,33.782 h1 r90
  text "P-" at 30.688,33.782 h1 r90
  text "BAT_V2" at 16.775,11.824 h1 r90
  text "BAT_V4" at 7.772,11.813 h1 r90
  text "BAT_V4" at 10.82,11.813 h1 r90
  text "BAT_V3" at 13.741,11.813 h1 r90
  text "BAT_V1" at 24.765,11.303 h1 r90
  text "TS1" at 58.326,8.89 h1 r90
  text "GND" at 62.644,8.89 h1 r90
  text "TS2" at 66.454,8.89 h1 r90
  text "GND" at 69.375,8.89 h1 r90
  text "GND" at 27.846,8.636 h1 r90
  text "GND" at 30.767,8.636 h1 r90
Mechanical 1:
  the board outline again, w0.254

## Dimensions
-1.825,-5 to -1.83,45 on Mechanical 1
-5,41.83 to 85,41.906 on Mechanical 1